# Altium PCB YoRadio.PcbDoc
Units mm, origin at the board's own origin, x right, y up, seen from the top; angles counter-clockwise.
Board outline 153.37 x 124.63 mm, 2 copper layers (Top Layer, Bottom Layer); 46 components, 48 nets, 188 pads, 15 vias.
Unrouted connection lines stored in the file: 2.
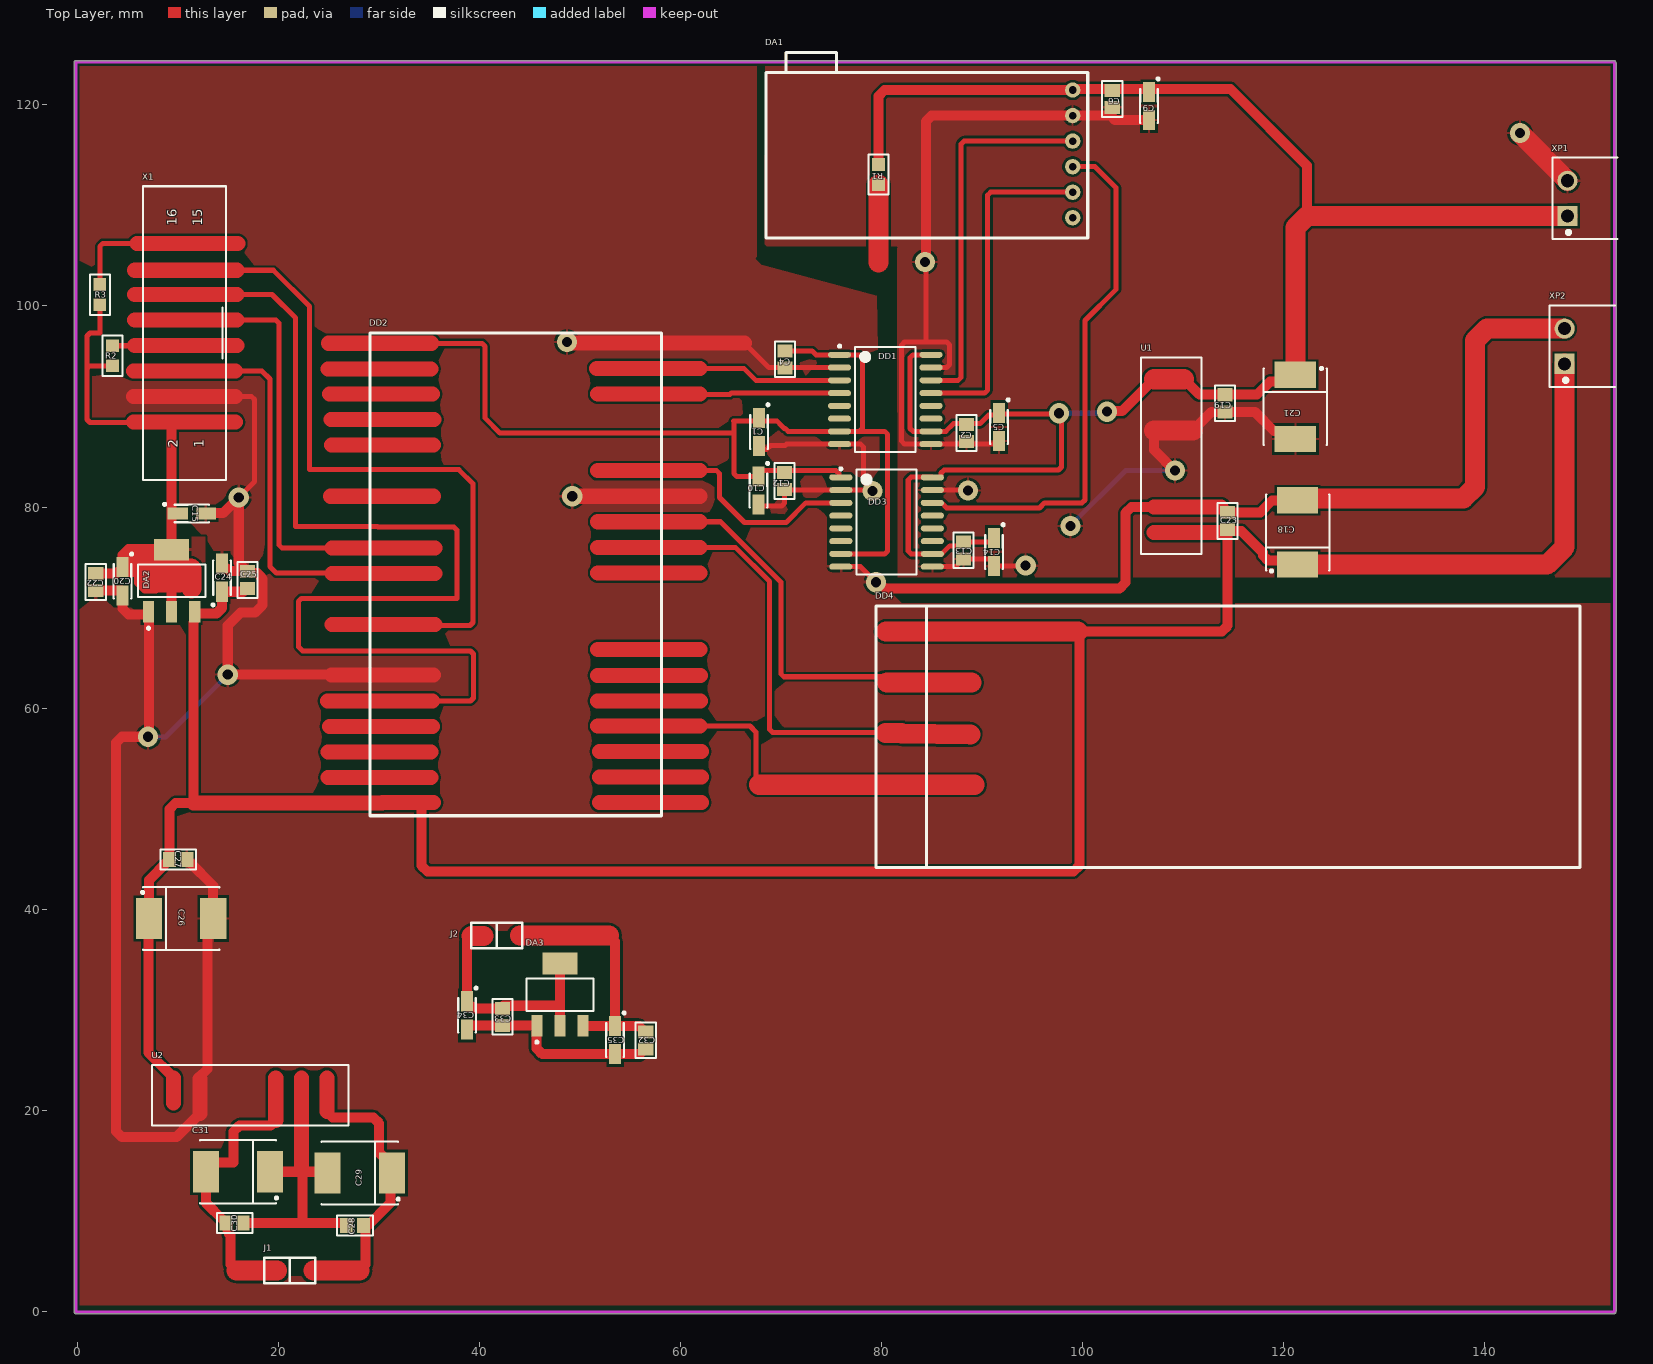
[diagram p0: Top Layer view]
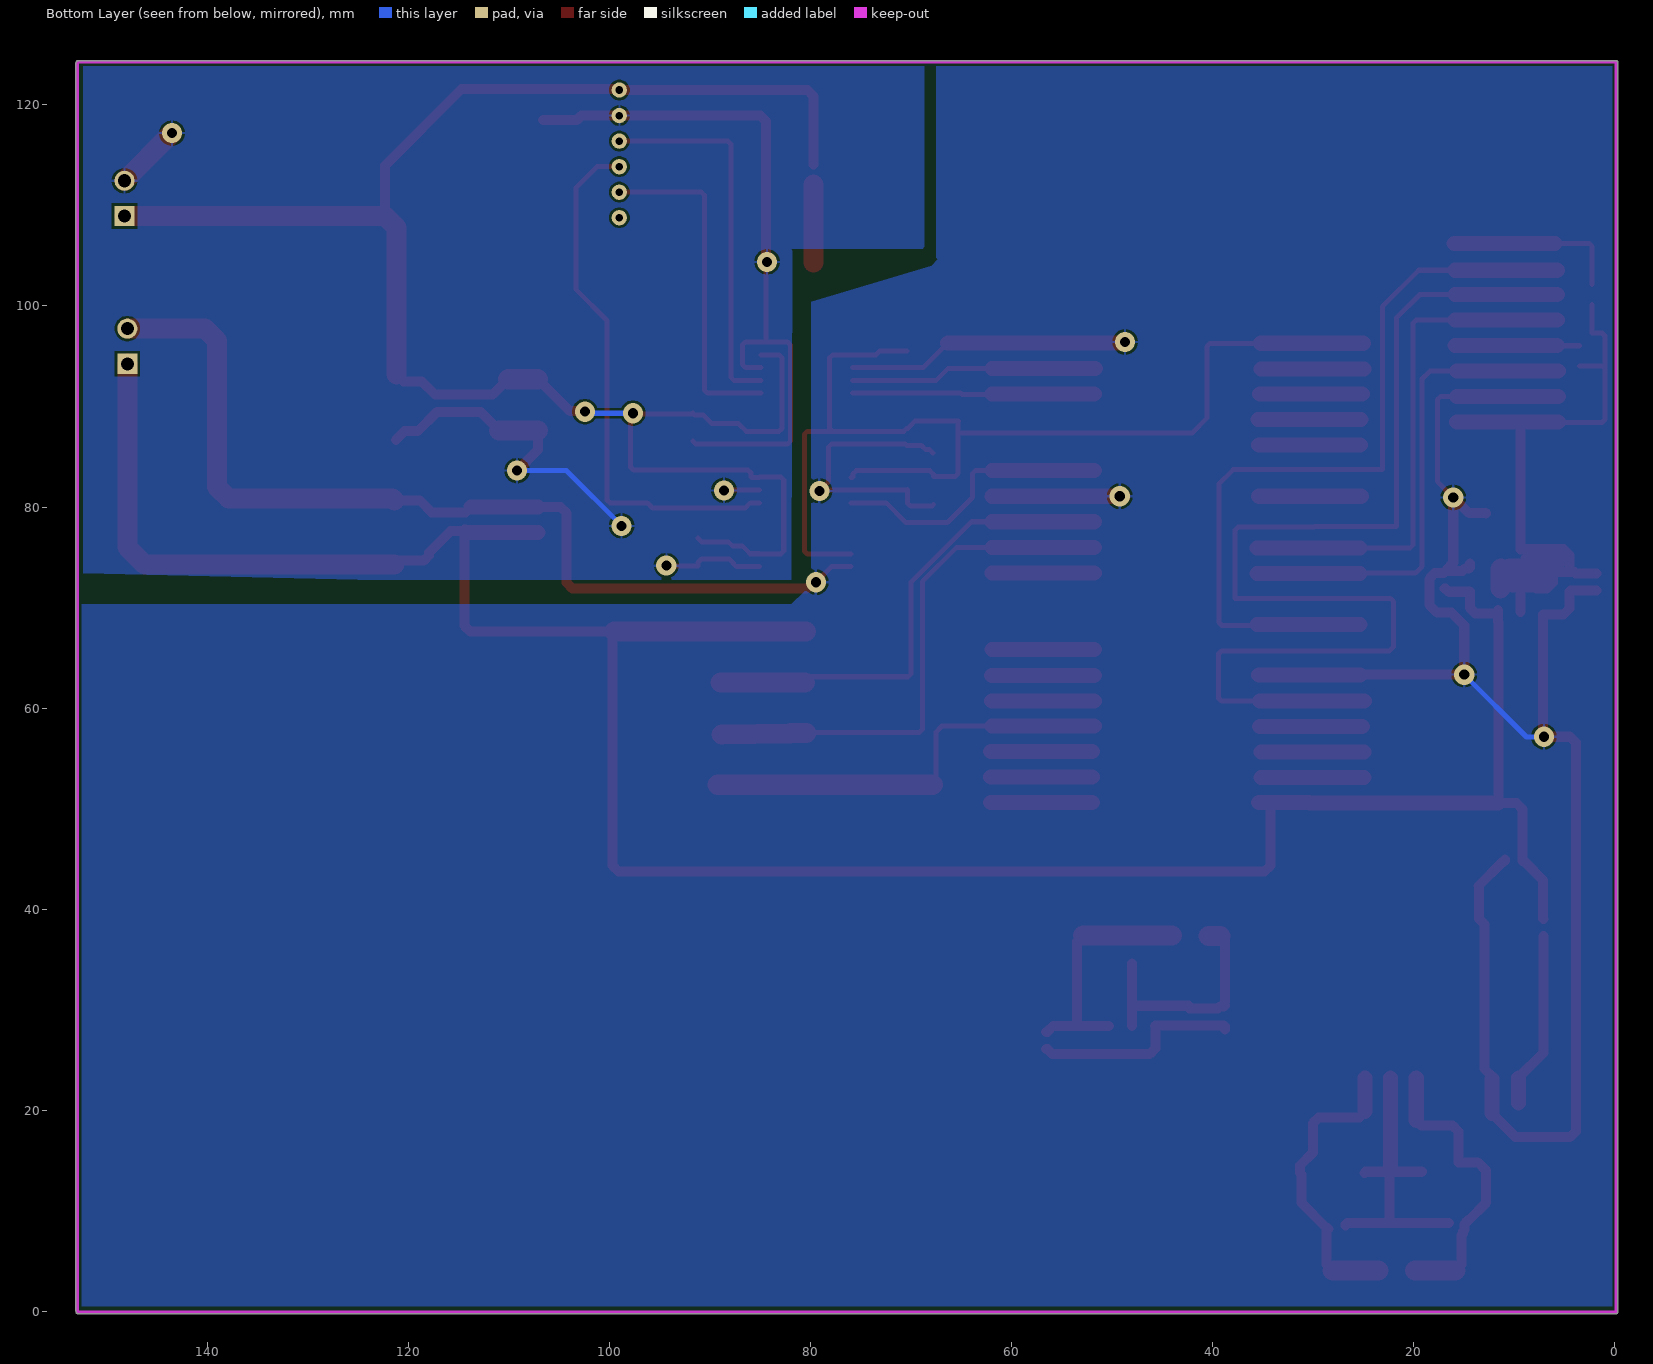
[diagram p1: Bottom Layer view, seen from below]

## Layer stack, top to bottom
Top Solder: solder mask 0.0102, Solder Resist, Dk 3.5
Top Layer: signal copper 0.0356
Dielectric 1: dielectric 0.32, FR-4, Dk 4.8
Bottom Layer: signal copper 0.0356
Bottom Solder: solder mask 0.0102, Solder Resist, Dk 3.5

## Board outline
-0.311,-0.076 -0.311,124.231 cw(c-0.16,124.231) -0.253,124.35 cw(c-0.135,124.257) -0.135,124.407 152.865,124.407 cw(c152.865,124.257) 153.016,124.257 153.058,124.13 153.058,0 153.049,-0.076 cw(c152.898,-0.076) 152.898,-0.227 -0.102,-0.227 -0.131,-0.224 cw(c-0.16,-0.076)

## Design rules (kind name [scope] priority, off if disabled: settings)
Clearance [All] p1: gap=0.254 ignorepadtopadclearanceinfootprint=FALSE
ComponentClearance [All] p1: gap=0 collisioncheckmode=3 verticalgap=2540 showdistances=TRUE donotcheckwithout3dbody=TRUE checkcomponentboundary=TRUE
PolygonConnect [All] p1: connectstyle=Relief reliefconductorwidth=0.254 reliefentries=4 polygonreliefangle="90 Angle" airgapwidth=0.254
RoutingCorners [All] p1: cornerstyle=90-Degree minsetback=0 maxsetback=0
RoutingVias [All] p1: holewidth=1 width=2 viastyle="Through Hole" minholewidth=0.3 minwidth=0.4 maxholewidth=6 maxwidth=10
SolderMaskExpansion [All] p1: expansion=0.102 istentingtop=FALSE
SupplyNets "Schematic Supply Nets_1" [InNet('GNDA')] p1: voltage=0.000
SupplyNets "Schematic Supply Nets" [InNet('GND')] p2: voltage=0.000
Width [All] p1: maxlimit=8 minlimit=0.254 preferedwidth=0.5
28 further rules are at their usual default settings.

## Components (designator, comment, footprint, x,y, rotation, side; value= is the part's Value field where it differs from the comment)
C1 "6.8uF" TC3216-1206-A 67.793,87.478 r270 top
C2 "0.1uF" cap0805 88.443,87.376 r270 top
C4 "0.1uF" cap0805 70.409,94.691 r270 top
C5 "6.8uF" TC3216-1206-A 91.694,87.96 r270 top
C6 "0.1uF" cap0805 102.946,120.599 r270 top
C9 "6.8uF" TC3216-1206-A 106.604,119.888 r270 top
C10 "6.8uF" TC3216-1206-A 67.767,81.636 r270 top
C12 "0.1uF" cap0805 70.358,82.601 r270 top
C13 "0.1uF" cap0805 88.163,75.692 r270 top
C14 "6.8uF" TC3216-1206-A 91.186,75.54 r270 top
C15 "6.8uF" TC3216-1206-A 11.379,79.375 r0 top
C18 "" TC7360-2924-E 121.387,77.47 r90 top
C19 "0.1uF" cap0805 114.173,90.322 r270 top
C20 "6.8uF" TC3216-1206-A 4.496,72.619 r270 top
C21 "100uF" TC7360-2924-E 121.158,89.967 r270 top
C22 "0.1uF" cap0805 1.829,72.542 r270 top
C23 "0.1uF" cap0805 114.427,78.613 r90 top
C24 "6.8uF" TC3216-1206-A 14.402,72.974 r90 top
C25 "*" cap0805 16.916,72.746 r90 top
C26 "" TC7360-2924-E 10.312,39.065 r0 top
C27 "0.1uF" cap0805 10.033,44.958 r0 top
C28 "0.1uF" cap0805 27.61,8.542 r180 top
C29 "100uF" TC7360-2924-E 28.092,13.749 r180 top
C30 "0.1uF" cap0805 15.646,8.771 r180 top
C31 "100uF" TC7360-2924-E 15.977,13.876 r180 top
C32 "0.1uF" cap0805 56.54,26.949 r270 top
C33 "0.1uF" cap0805 42.291,29.286 r270 top
C34 "6.8uF" TC3216-1206-A 38.76,29.439 r270 top
C35 "6.8uF" TC3216-1206-A 53.492,26.975 r270 top
DA1 "PCM5102" PCM5102 100.508,123.241 r180 top
DA2 "LM1117MP-3.3" SOT223 9.373,72.669 r0 top
DA3 "LM1117MP-3.3" SOT223 48.006,31.496 r0 top
DD1 "ADUM1402ARW" WSO-16 80.366,90.703 r0 top
DD2 "Wrover38" Wrover 30.112,96.291 r0 top
DD3 "ADUM1402ARW" WSO-16 80.493,78.511 r0 top
DD4 "RS-485" PCBComponent_1 79.451,70.155 r0 top
J1 "PLS-2" PLS-2 21.133,4.046 r270 top
J2 "PLS-2" PLS-2 41.707,37.363 r90 top
R1 "10k" res0805 79.705,113.081 r270 top
R2 "100" res0805 3.505,95.047 r90 top
R3 "100" res0805 2.235,101.127 r90 top
U1 "AM1D-0505SH30N" AM1D_3kV#1 107.086,77.47 r90 top
U2 "AM1D-0505SH30N" AM1D_3kV#2 9.576,23.223 r0 top
X1 "PBD-16" PBD-16 11.913,88.417 r90 top
XP1 "15EDGRC-3.5-02P" 15EDGRC-3.5-02P 154.229,114.757 r270 top
XP2 "15EDGRC-3.5-02P" 15EDGRC-3.5-02P 153.949,100.051 r270 top

## Footprints (in the part's own frame and the unit in brackets; to place one, negate y for a bottom-side part, rotate by r counter-clockwise, add the part's x,y. Pads: shape width x height; smd on the part's side, far side on the other; paste and mask are expansions set on the pad)
15EDGRC-3.5-02P [mm]
  rect 2x2 hole 1.3: 1(5.8,-6)
  round 2 hole 1.3: 2(2.3,-6)
  silkscreen extent 0,-7.5 8.1,-1, body extent 0.15,-7.25 7.95,1.95, height 7.21
AM1D_3kV#1 [mm]
  rect 0x1.6 all layers, no hole: 1(0,0)
  oval 0x1.6 all layers, no hole: 2(2.54,0) 3(10.16,0) 4(12.7,0) 5(15.24,0)
  silkscreen extent -2.15,-4.75 17.4,1.27
AM1D_3kV#2 [mm]
  rect 0x0 all layers, no hole: 1(0,0)
  round 0 all layers, no hole: 2(2.54,0) 3(10.16,0) 4(12.7,0) 5(15.24,0)
  silkscreen extent -2.15,-4.75 17.4,1.27
cap0805 [mm]
  rect 1.3x1.5 smd: 1(-0.85,0) 2(0.85,0)
  silkscreen extent -1.78,-1 1.78,1
PBD-16 [mm]
  rect 0x0 all layers, no hole: 1(0,0)
  round 0 all layers, no hole: 2(0,2.54) 3(2.54,0) 4(2.54,2.54) 5(5.08,0) 6(5.08,2.54) 7(7.62,0) 8(7.62,2.54) 9(10.16,0) 10(10.16,2.54) 11(12.7,0) 12(12.7,2.54) 13(15.24,0) 14(15.24,2.54) 15(17.78,0) 16(17.78,2.54)
  silkscreen extent -5.71,-2.86 23.49,5.4
PCBComponent_1 [mm]
  round 0 all layers, no hole: 1(2.54,-2.54) 2(2.54,-7.62) 3(2.54,-12.7) 4(2.54,-17.78) 5(2.54,-22.86)
  silkscreen extent 0,-26 70,0
PCM5102 [mil]
  round 60 hole 30: 1(59.06,69.29) 2(59.06,169.29) 3(59.06,269.29) 4(59.06,369.29) 5(59.06,469.29) 6(59.06,569.29)
  round 0 all layers, no hole: 7(531.5,610.24)
  silkscreen extent 0,-79 1260,650
PLS-2 [mm]
  rect 0x1.6 all layers, no hole: 1(0,-1.27)
  oval 0x1.6 all layers, no hole: 2(0,1.27)
  silkscreen extent -1.27,-2.54 1.27,2.53
res0805 [mm]
  rect 1.27x1.27 smd: 1(-1,0) 2(1,0)
  silkscreen extent -2,-1 2,1
SOT223 [mm] "SOT-223/SC-73; 4 Leads; Body 6.7 x 7.3 mm, inc. leads (LxW max)"
  rect 1.1x2.15 smd: 1(-2.3,-3.1) 2(0,-3.1) 3(2.3,-3.1)
  rect 3.5x2.15 smd: 4(0,3.1)
  silkscreen extent -3.35,-4.85 3.35,1.63
TC3216-1206-A [mm] "Capacitor, SM Tantalum; Body 3.2 x 1.6 mm (LxW typ)"
  rect 2x1.2 smd: 1(-1.4,0) 2(1.4,0)
  silkscreen extent -2.82,-0.9 1.7,1.03
TC7360-2924-E [mm] "Capacitor, SM Tantalum; Body 7.3 x 6.0 mm (LxW typ)"
  rect 2.6x4.1 smd: 1(-3.2,0) 2(3.2,0)
  silkscreen extent -3.95,-3.15 3.8,3.15, body extent -3.65,-2.15 3.65,2.15, height 4.12
Wrover [mm]
  round 0 all layers, no hole: 1(0,0) 2(0,-2.54) 3(0,-5.08) 4(0,-7.62) 5(0,-10.16) 6(0,-12.7) 7(0,-15.24) 8(0,-17.78) 9(0,-20.32) 10(0,-22.86) 11(0,-25.4) 12(0,-27.94) 13(0,-30.48) 14(0,-33.02) 15(0,-35.56) 16(0,-38.1) 17(0,-40.64) 18(0,-43.18) 19(0,-45.72) 20(26.5,-45.72) 21(26.5,-43.18) 22(26.5,-40.64) 23(26.5,-38.1) 24(26.5,-35.56) 25(26.5,-33.02) 26(26.5,-30.48) 27(26.5,-27.94) 28(26.5,-25.4) 29(26.5,-22.86) 30(26.5,-20.32) 31(26.5,-17.78) 32(26.5,-15.24) 33(26.5,-12.7) 34(26.5,-10.16) 35(26.5,-7.62) 36(26.5,-5.08) 37(26.5,-2.54) 38(26.5,0)
  silkscreen extent -1,-47 28,1
WSO-16 [mm] "20-Pin Small Outline Integrated Circuit (SOIC20), IPC Medium Density"
  oval 2.3x0.6 smd: 1(-4.55,4.445) 2(-4.55,3.175) 3(-4.55,1.905) 4(-4.55,0.635) 5(-4.55,-0.635) 6(-4.55,-1.905) 7(-4.55,-3.175) 8(-4.55,-4.445) 9(4.55,-4.445) 10(4.55,-3.175) 11(4.55,-1.905) 12(4.55,-0.635) 13(4.55,0.635) 14(4.55,1.905) 15(4.55,3.175) 16(4.55,4.445)
  silkscreen extent -4.67,-5.21 3,5.42, body extent -5.31,-5.25 5.31,5.25, height 2.62

## Part data
C1 C5 C9 C10 C14 C15 C20 C24 C34 C35: library part capA, "Танталовый конденсатор, SMD", Package="SMD A", Group=Конденсаторы, NPads=2, Part Number=capA, SType=SMD
C2 C4 C6 C12 C13 C19 C22 C23 C25 C27 C28 C30 C32 C33: library part cap0805, "Керамический конденсатор, SMD", Package="SMD 0805", Group=Конденсаторы, NPads=2, Part Number=cap0805, SType=SMD
  C22: ValueSCH=0.1uF
C18 C26: library part capE, "Танталовый конденсатор, SMD", Package="SMD E", ValueSCH=100uF, Group=Конденсаторы, NPads=2, Part Number=capE, SType=SMD
C21 C29 C31: library part capE, "Танталовый конденсатор, SMD", Package="SMD E", Group=Конденсаторы, NPads=2, Part Number=capE, SType=SMD, ValueSCH=100uF
DA2 DA3: "Линейный стабилизатор 3.3V", Package=SOT223, Analog=SPX1117M3L-3.3, Group=Микросхемы, HelpURL=\DATA\LM1117.pdf, NPads=4, Part Number=LM1117MP-3.3, SType=SMD, ValueSCH=LM1117MP-3.3
DD1 DD3: "Цифровой оптрон 4 канала", Package=SO-16W, Group=Микросхемы, NPads=16, Part Number=ADUM1402ARW, SType=SMD, ValueSCH=ADUM1402ARW
J1 J2: "Однорядный штыревой разъем 2 шаг 2.54мм", Group=Разъемы, NPads=2, Part Number=PLS-2, SType=TH, ValueSCH=PLS-2
R1 R2 R3: library part res0805, "Резистор 0.125 W, SMD", Package="SMD 0805", Group=Резисторы, NPads=2, Part Number=res0805, SType=SMD
U1 U2: "Преобразователь 1Вт 5В ->5В", Package=SIP7, Group=Микросхемы, HelpURL=\DATA\AM1D.pdf, NPads=4, Part Number=AM1D-0505SH30N, SType=TH, ValueSCH=AM1D-0505SH30N
X1: "Розетка на плату 8х2 контактов.2,54 х 2,54 мм", Group=Разъемы, NPads=16, Part Number=PBD-16, SType=TH, ValueSCH=PBD-16
XP1 XP2: "Вилка на плату прямой угол 2 конт. шаг 3.5мм", Group=Разъемы, NPads=2, Part Number=15EDGRC-3.5-02P, SType=TH, ValueSCH=15EDGRC-3.5-02P

## Via types
v1: diameter 2, hole 1, Top Layer to Bottom Layer, 15 vias

## Nets (pads, with @x,y where several pads share a name; then routed paths per layer and width w, separated by ;. In a path a pad name is that pad's centre, name@x,y a point inside that pad or via, vN(x,y) a via of type N, cw(c..) or ccw(c..) an arc to the next point about the centre after c; other vN are vias at no path point)
3.3V: C15.1 C20.1 C22.1 DA2.2 DA2.4 R2.1 R3.1 X1.1 X1.2 | length 77.4
  Top Layer w0.5: R3.1 2.235,97.317 1.258,97.317 0.965,97.024 0.965,93.777 ; R2.1 1.235,94.047 0.965,93.777 ; X1.2 1.258,88.417 0.965,88.71 0.965,93.777
  Top Layer w1: C22.1 3.87,73.392 3.996,73.519 4.396,73.519 4.496,73.619 C20.1 4.496,75.233 5.082,75.819 5.639,75.819 9.323,75.819 DA2.4 X1.2 ; C20.1@4.496,73.558 6.375,73.558 ; 7.747,71.907 6.724,71.907 6.139,72.493 6.139,73.322 6.375,73.558 ; 8.407,74.144 7.822,73.558 6.375,73.558 ; DA2.2 9.373,71.907
  Top Layer w1.5: 5.58,88.443 15.74,88.443
  Top Layer w2: 5.639,74.879 5.842,74.676 7.976,74.676 ; 7.493,72.771 7.747,72.517 10.135,72.517 10.439,72.822 10.439,73.889 8.763,73.889 7.976,74.676 ; 8.407,74.676 7.976,74.676 ; 11.303,73.885 11.334,73.854 11.334,71.927
3.3Vin: C1.1 C4.1 C10.1 C12.1 DD1.1 DD1.7 DD2.1 DD3.1 DD3.7 | length 112.4
  Top Layer w0.5: 35.23,96.291 35.255,96.266 40.271,96.266 40.564,95.973 40.564,88.837 42.025,87.376 65.303,87.376 ; C10.1 65.596,83.036 65.303,83.328 65.303,87.376 ; C10.1@67.767,83.267 68.117,83.617 75.45,83.617 75.743,83.324 75.743,83.003 75.789,82.956 DD3.1 ; C4.1 73.084,95.541 73.476,95.148 DD1.1 77.787,95.148 78.08,94.856 78.08,87.821 77.787,87.528 ; DD3.7 80.307,75.336 80.6,75.629 80.6,87.236 80.307,87.528 77.787,87.528 ; 65.303,87.376 65.303,88.519 65.278,88.544 67.793,88.544 69.616,88.544 69.909,88.252 69.909,88.22 70.309,87.82 70.409,87.82 70.7,87.528 DD1.7 77.787,87.528
  Top Layer w1.5: 24.994,96.291 DD2.1 35.23,96.291
5V: C18.1 C23.1 C24.1 C25.1 C26.1 C27.1 DA2.3 DD2.19 DD4.1 U1.1 U2.1 XP2.1 | length 283.6
  Top Layer w0.5: 33.985,50.597 34.239,50.343
  Top Layer w1: C26.1@7.061,37.317 7.061,25.738 U2.1 ; C26.1@7.061,39.014 C26.1 7.112,42.887 8.933,44.708 9.033,44.708 9.183,44.858 C27.1 9.183,49.972 9.769,50.557 11.557,50.557 11.557,68.536 11.623,68.602 DA2.3@11.623,69.745 ; 9.576,20.701 9.601,20.676 ; DA2.3 11.673,69.443 11.723,69.393 13.816,69.393 14.402,69.979 C24.1 16.495,71.574 16.816,71.896 C25.1 ; 34.239,50.343 34.239,44.325 34.825,43.739 99.084,43.739 99.67,44.325 99.67,67.462 99.517,67.615 113.841,67.615 114.427,68.201 C23.1 ; C23.1@114.034,77.47 114.327,77.763 C23.1 ; C18.1 120.961,74.695 118.422,74.695 117.932,75.186 117.932,75.463 115.783,77.613 114.577,77.613 C23.1
  Top Layer w1.5: 9.576,20.701 U2.1 ; 11.557,50.557 30.299,50.557 30.334,50.592 30.337,50.589 ; 30.345,50.597 33.985,50.597 35.425,50.597 ; U1.1 C23.1@114.034,77.47
  Top Layer w2: 80.442,67.615 DD4.1 99.517,67.615 ; C18.1 146.203,74.27 147.949,76.017 XP2.1
5VA: C2.1 C5.1 C6.1 C9.1 C13.1 C14.1 C19.1 C21.1 DA1.1 DD1.10 DD1.16 DD3.10 DD3.16 R1.1 U1.5 XP1.1 | length 189.3
  Top Layer w0.5: DD1.16 83.122,95.148 82.829,94.856 82.829,87.821 83.122,87.528 DD1.10 86.385,87.528 87.147,88.29 89.789,88.29 90.637,89.138 91.472,89.138 C5.1 91.821,89.233 97.889,89.233 97.889,83.986 97.596,83.693 86.227,83.693 85.912,83.378 85.912,83.003 85.866,82.956 DD3.16 85.023,82.976 84.103,82.976 84.096,82.982 82.944,82.982 82.652,82.689 82.652,75.629 82.944,75.336 DD3.10 85.062,75.356 85.998,75.356 86.785,76.142 87.763,76.142 C13.1 90.836,76.542 91.186,76.892 C14.1
  Top Layer w1: R1.1 79.705,120.895 80.291,121.481 DA1.1 99.108,121.581 102.946,121.581 106.604,121.581 114.705,121.581 122.33,113.956 122.33,108.966 ; v1(102.438,89.484) 102.495,89.541 103.917,89.541 U1.5 ; 110.084,92.71 111.608,91.186 117.348,91.186 118.651,92.489 120.48,92.489 C21.1
  Top Layer w2: U1.5 110.084,92.71 ; C21.1 121.158,107.794 122.33,108.966 148.195,108.966 XP1.1@148.203,108.957
  Bottom Layer w0.5: v1(97.663,89.332) 102.286,89.332 v1(102.438,89.484)
+U1: C28.1 C29.1 J1.2 U2.5 | length 30.2
  Top Layer w1: 24.816,19.864 25.402,19.279 29.437,19.279 30.023,18.693 30.023,15.769 31.292,14.499 C29.1 31.16,13.616 31.16,10.785 28.71,8.335 C28.1@28.61,8.335 ; 28.065,4.046 28.651,4.632 28.651,7.993 C28.1@28.46,8.185
  Top Layer w1.5: 24.816,19.864 U2.5
  Top Layer w2: 23.47,4.046 28.065,4.046
+U2: C32.1 C35.1 DA3.3 J2.1 | length 24.5
  Top Layer w1: DA3.3 53.471,28.396 53.471,36.778 52.885,37.363 ; C35.1 55.865,28.375 56.44,27.799 C32.1
  Top Layer w2: 44.018,37.363 52.885,37.363
+U3: C33.1 C34.1 DA3.2 DA3.4 J2.2 | length 23.4
  Top Layer w1: C34.1@38.76,30.439 38.86,30.339 39.26,30.339 39.463,30.136 C33.1 ; C34.1 38.76,36.854 39.227,37.32 ; C33.1@42.393,30.392 47.893,30.392 48.006,30.505 ; DA3.2 48.006,30.505 ; DA3.4 48.006,30.505
  Top Layer w2: 39.227,37.32 40.394,37.32
-U1: C30.2 C31.2 J1.1 U2.3 | length 30.4
  Top Layer w1: 15.826,4.046 15.24,4.632 15.24,7.561 15.092,7.708 15.092,7.935 14.946,8.081 14.946,8.621 C30.2 14.796,8.871 14.646,9.021 14.546,9.021 12.777,10.79 12.777,13.988 13.577,14.788 15.524,14.788 15.524,17.88 16.11,18.466 19.202,18.466 19.736,18.999
  Top Layer w1.5: 19.736,18.999 U2.3
  Top Layer w2: 15.826,4.046 J1.1
B_CLK: DA1.5 DD1.13 | length 33.7
  Top Layer w0.5: DD1.13 90.258,91.338 90.551,91.631 90.551,111.028 90.844,111.321 DA1.5
BCLK: DD1.4 DD2.36 | length 25.2
  Top Layer w0.5: 60.833,91.237 60.858,91.211 64.922,91.211 65.049,91.338 DD1.4
  Top Layer w1.5: 51.765,91.237 56.845,91.237 60.833,91.237 61.925,91.237
CMD: DD2.18 DD2.27 | length 10.2
  Top Layer w1.5: 24.943,53.086 35.179,53.086
CS: DD2.10 X1.5 X1.6 | length 49.2
  Top Layer w0.5: 15.74,93.523 18.364,93.523 19.152,92.735 19.152,74.066 19.787,73.431 25.298,73.431 25.324,73.406
  Top Layer w1.5: 5.58,93.523 15.74,93.523 ; 25.324,73.406 35.56,73.406
D_OUT: DA1.4 DD3.14 | length 53.2
  Top Layer w0.5: DD3.14 85.973,80.416 86.481,79.908 95.704,79.908 96.212,80.416 99.936,80.416 100.228,80.709 100.228,98.552 103.302,101.625 103.302,111.787 101.228,113.861 DA1.4
DC: DD2.9 X1.9 X1.10 | length 52.2
  Top Layer w0.5: 15.867,98.603 19.748,98.603 20.041,98.31 20.041,76.239 20.333,75.946 25.324,75.946
  Top Layer w1.5: 5.707,98.603 9.373,98.603 11.913,98.603 15.867,98.603 ; 25.324,75.946 30.112,75.946 35.56,75.946
Dir: DD2.23 DD4.4 | length 42.8
  Top Layer w0.5: 61.925,58.217 66.904,58.217 67.513,57.607 67.513,52.668 67.806,52.375
  Top Layer w1.5: 51.765,58.217 56.845,58.217 61.925,58.217
  Top Layer w2: 67.806,52.375 89.256,52.375
DOUT: DD2.33 DD3.3 | length 28.5
  Top Layer w0.5: 61.925,83.617 63.588,83.617 63.881,83.324 63.881,80.95 66.37,78.461 70.51,78.461 72.466,80.416 DD3.3
  Top Layer w1.5: 51.765,83.617 56.845,83.617 61.925,83.617
EN: DD2.2 | length 10.2
  Top Layer w1.5: 24.943,93.751 35.179,93.751
G0: DD2.25 DD2.28 | length 10.2
  Top Layer w1.5: 51.74,63.246 61.976,63.246
G2: DD2.24 DD2.26 | length 10.2
  Top Layer w1.5: 51.74,60.706 61.976,60.706
G5: DD2.29 | length 10.2
  Top Layer w1.5: 51.765,73.457 56.845,73.457 61.925,73.457
G12: DD2.13
G27: DD2.11
G32: DD2.7 | length 10.1
  Top Layer w1.5: 25.171,81.077 30.175,81.077 ; 30.345,81.077 35.425,81.077
G33: DD2.8
G34: DD2.5 | length 10.2
  Top Layer w1.5: 25.265,86.157 30.345,86.157 35.425,86.157
G35: DD2.6
GND: C1.2 C4.2 C10.2 C12.2 C15.2 C18.2 C20.2 C22.2 C23.2 C24.2 C25.2 C26.2 C27.2 DA2.1 DD1.2 DD1.8 DD2.14 DD2.32 DD2.38 DD3.2 DD3.8 DD4.5 U1.2 U2.2 X1.3 X1.4 XP2.2 | length 345.1
  Top Layer w0.5: 15.74,90.983 17.335,90.983 17.628,90.69 17.628,82.525 v1(16.053,80.95) ; 25.24,63.322 25.265,63.297 ; 66.345,96.317 68.783,93.878 DD1.2 ; C10.2 67.891,80.112 70.065,80.112 70.358,80.404 C12.2 70.422,81.686 DD3.2 v1@78.181,81.686 ; C1.2@67.818,85.385 68.168,85.735 68.568,85.735 68.952,86.12 70.409,86.12 70.548,86.258 DD1.8 75.835,86.278 76.755,86.278 76.762,86.284 77.888,86.284 78.181,85.991 78.181,82.525 v1(79.096,81.61) ; DD3.8 77.902,74.066 v1(79.451,72.517)
  Top Layer w1: C22.2 4.396,71.692 4.496,71.592 C20.2 4.496,69.904 5.082,69.318 7.112,69.318 7.112,57.226 v1(7.036,57.15) 4.431,57.15 3.845,56.564 3.845,17.903 4.431,17.317 9.845,17.317 12.217,19.689 ; C27.2 10.883,44.858 11.033,44.708 11.133,44.708 13.538,42.303 13.512,42.277 C26.2 12.952,38.505 12.952,24.109 12.116,23.272 U2.2 12.217,23.122 ; C15.2 12.79,79.386 14.489,79.386 v1(16.053,80.95) 16.053,74.459 16.666,73.846 16.666,73.746 16.966,73.446 17.917,73.446 18.263,73.1 18.263,73.016 18.42,72.858 18.42,70.238 17.677,69.494 16.231,69.494 14.961,68.224 v1(14.961,63.322) 25.24,63.322 ; C24.2 14.402,73.974 14.502,73.874 14.902,73.874 15.141,73.635 C25.2@16.666,73.635 ; v1(79.451,72.517) 79.722,72.517 80.331,71.907 103.681,71.907 104.267,72.493 104.267,79.424 104.853,80.01 U1.2 ; C23.2@113.78,80.01 114.327,79.463 C23.2 117.665,79.463 118.847,80.645 121.362,80.645 C18.2
  Top Layer w1.5: 5.58,90.983 15.74,90.983 ; 12.217,19.689 12.217,23.122 ; 25.265,63.297 30.345,63.297 35.425,63.297 ; v1@48.91,81.077 v1(49.225,81.077) 56.845,81.077 61.925,81.077 ; v1@48.91,96.317 56.845,96.317 61.925,96.317 66.345,96.317 ; U1.2 C23.2@113.78,80.01
  Top Layer w2: C18.2 121.565,80.848 137.868,80.848 139.04,82.02 139.04,96.579 140.211,97.751 XP2.2
  Bottom Layer w0.5: v1(7.036,57.15) 7.061,57.125 8.763,57.125 v1(14.961,63.322)
  other v1: 48.692,96.418
GND1: C28.2 C29.2 C30.1 C31.1 U2.4 | length 30.9
  Top Layer w1: C30.1 22.403,8.771 ; C31.1 22.098,13.876 ; C29.2 24.765,13.876 22.098,13.876 ; C28.2 26.76,8.621 26.61,8.771 22.403,8.771 ; 22.098,13.876 22.276,14.054 22.403,13.927 22.403,8.771
  Top Layer w1.5: 22.276,14.054 U2.4
GNDA: C2.2 C5.2 C6.2 C9.2 C13.2 C14.2 C19.2 C21.2 DA1.2 DD1.9 DD1.15 DD3.9 DD3.15 U1.3 XP1.2 | length 126.6
  Top Layer w0.5: v1@84.404,104.445 84.423,104.426 84.423,96.418 ; DD1.15 86.474,93.878 86.766,94.171 86.766,96.126 86.474,96.418 84.423,96.418 ; DD3.9 87.371,74.066 87.663,74.359 87.663,74.442 88.063,74.842 C13.2 90.836,74.842 91.186,74.492 C14.2 v1@94.129,74.14 ; DD3.15 v1@88.392,81.686 ; C5.2 91.392,86.258 DD1.9 82.284,86.258 81.991,86.551 81.991,96.126 82.284,96.418 84.423,96.418
  Top Layer w1: v1@84.404,104.445 84.404,118.355 84.99,118.941 DA1.2 102.786,118.941 103.239,118.488 C9.2 ; U1.3 107.086,85.7 v1(109.169,83.617) ; 110.973,87.63 112.815,89.472 C19.2 117.131,89.472 119.037,87.567 120.358,87.567 C21.2 C21.2@121.235,86.69
  Top Layer w2: U1.3 110.973,87.63 ; v1@143.516,117.17 XP1.2
  Bottom Layer w0.5: v1(98.781,78.13) 104.267,83.617 v1(109.169,83.617)
  other v1: 94.336,74.168 88.595,81.661 84.303,104.394 143.51,117.196
L_RC: DA1.3 DD1.14 | length 37.5
  Top Layer w0.5: DD1.14 87.617,92.608 87.909,92.901 87.909,116.108 88.202,116.401 DA1.3
LRC: DD1.3 DD2.37 | length 24.7
  Top Layer w0.5: 61.925,93.777 61.951,93.802 66.294,93.802 67.488,92.608 DD1.3
  Top Layer w1.5: 51.664,93.777 56.845,93.777 61.925,93.777
MOSI: DD2.15 X1.11 X1.12 | length 117.8
  Top Layer w0.5: 15.867,101.143 19.367,101.143 21.692,98.818 21.692,78.054 29.856,78.054 29.903,78.007 37.452,78.007 37.744,77.715 37.744,70.917 22.289,70.917 21.996,70.624 21.996,66.104 22.416,65.684 39.103,65.684 39.395,65.392 39.395,60.999 39.103,60.706 35.306,60.706
  Top Layer w1.5: 5.707,101.143 11.913,101.143 15.867,101.143 ; 24.867,60.706 35.306,60.706
NetC32_2: C32.2 C33.2 C34.2 C35.2 DA3.1 | length 20.9
  Top Layer w1: C34.2 38.76,28.336 38.86,28.436 C33.2 45.666,28.436 DA3.1 45.669,28.359 45.669,26.161 46.255,25.575 C35.2 55.916,25.575 56.44,26.099 C32.2
NetDA1_7: DA1.7 R1.2 | length 7.7
  Top Layer w2: 79.705,104.343 R1.2
NetR2_2: R2.2 X1.7 X1.8 | length 13
  Top Layer w0.5: R2.2 5.945,96.047 6.215,96.317
  Top Layer w1.5: 5.707,96.063 15.867,96.063
NetR3_2: R3.2 X1.15 X1.16 | length 17.6
  Top Layer w0.5: R3.2 2.235,105.93 2.528,106.223 5.951,106.223
  Top Layer w1.5: 5.951,106.223 15.951,106.223
RX2: DD2.30 DD4.3 | length 54.2
  Top Layer w0.5: 61.011,75.997 61.925,75.997 65.456,75.997 68.867,72.586 68.867,57.875 69.16,57.582 80.366,57.582 80.416,57.531
  Top Layer w1.5: 51.765,75.997 56.845,75.997 61.011,75.997 61.925,75.997
  Top Layer w2: 80.416,57.531 81.992,57.512 ; DD4.3 88.818,57.373
RXD: DD2.34
SCK: DD2.12 X1.13 X1.14 | length 79.9
  Top Layer w0.5: 15.867,103.556 19.494,103.556 23.089,99.961 23.089,83.718 30.754,83.718 31.09,83.718 37.948,83.718 39.345,82.321 39.345,68.517 39.052,68.224 35.662,68.224 35.56,68.326
  Top Layer w1.5: 5.707,103.556 15.867,103.556 ; 25.324,68.326 35.56,68.326
SD0: DD2.21 | length 10.2
  Top Layer w1.5: 51.935,53.137 57.015,53.137 62.095,53.137
SD1: DD2.22 | length 10.2
  Top Layer w1.5: 51.935,55.677 57.015,55.677 62.095,55.677
SD2: DD2.16 | length 10.2
  Top Layer w1.5: 25.07,58.166 35.306,58.166
SD3: DD2.17 | length 10.2
  Top Layer w1.5: 24.943,55.626 35.179,55.626
SLK: DD2.20 | length 10.2
  Top Layer w1.5: 51.935,50.597 57.015,50.597 62.095,50.597
SN: DD2.4 | length 10.2
  Top Layer w1.5: 25.222,88.697 35.458,88.697
SP: DD2.3 | length 10.2
  Top Layer w1.5: 25.095,91.237 35.331,91.237
TX2: DD2.31 DD4.2 | length 49.2
  Top Layer w0.5: 61.925,78.537 63.982,78.537 69.977,72.542 69.977,63.412 70.27,63.119 79.934,63.119 80.518,62.535
  Top Layer w1.5: 51.765,78.537 56.845,78.537 61.925,78.537
  Top Layer w2: 80.518,62.535 88.951,62.535
TXD: DD2.35
pads on no net: DA1.6 DD1.5 DD1.6 DD1.11 DD1.12 DD3.4 DD3.5 DD3.6 DD3.11 DD3.12 DD3.13 U1.4
copper on no net: | length 10.2
  Top Layer w1.5: 51.765,65.837 56.845,65.837 61.925,65.837

## Polygon pours and split planes (outlines as drawn)
GNDA on Top Layer "GNDA_L01_P004" (solid, pour order 4): 68.402,124.155 152.588,124.13 153.049,73 124.741,73 81.61,73 81.534,105.766 81.61,105.842 81.509,105.943 68.377,105.943
GND on Top Layer "GND_L01_P002" (solid, remove dead copper, pour order 2): -1.626,125.374 67.589,125.374 67.589,104.877 67.437,104.724 68.047,104.115 79.527,101.041 80.035,72.39 82.017,70.409 153.058,70.409 153.643,0.584 122.53,0.584 -1.092,0.584
3.3V on Top Layer "3.3V_L01_P000" (solid, remove dead copper, pour order 0): 4.928,77.089 4.978,77.038 12.7,77.038 12.7,70.942 12.675,70.968 4.877,70.968
GND on Bottom Layer "GND_L02_P003" (solid, remove dead copper, pour order 3): -1.753,125.285 67.462,125.285 67.462,104.788 67.31,104.635 67.92,104.026 79.908,100.406 79.908,72.301 81.89,70.32 152.865,70.32 152.563,0.495 122.403,0.495 -1.219,0.495
GNDA on Bottom Layer "GNDA_L02_P005" (solid, pour order 5): 68.682,123.901 152.359,123.901 152.359,73.406 125.021,72.746 81.89,72.746 81.813,105.512 81.89,105.588 81.788,105.689 68.656,105.689

## Keep-outs
Keep-Out Layer:
  lines w0.3: -0.16,-0.076 -0.16,124.231 ; -0.135,124.257 152.865,124.257 ; -0.102,-0.076 152.898,-0.076 ; 152.908,0 152.908,124.13

## Other copper
Top Layer:
  region: 13.538,42.303
  region: 13.538,42.303
  region: 13.538,42.303

## Text inside footprints (layer, text, board x,y; h text height)
X1: Top Overlay "16" at 9.881,107.975 h0.95 r90; Top Overlay "15" at 12.421,107.975 h0.95 r90; Top Overlay "2" at 10.008,85.877 h0.95 r90; Top Overlay "1" at 12.548,85.877 h0.95 r90